# Altium PCB CMSIS-DAP-Pro.PcbDoc
Units mm, origin at the board's own origin, x right, y up, seen from the top; angles counter-clockwise.
Board outline 42.04 x 23.11 mm, 2 copper layers (Top Layer, Bottom Layer); 31 components, 27 nets, 131 pads, 42 vias.
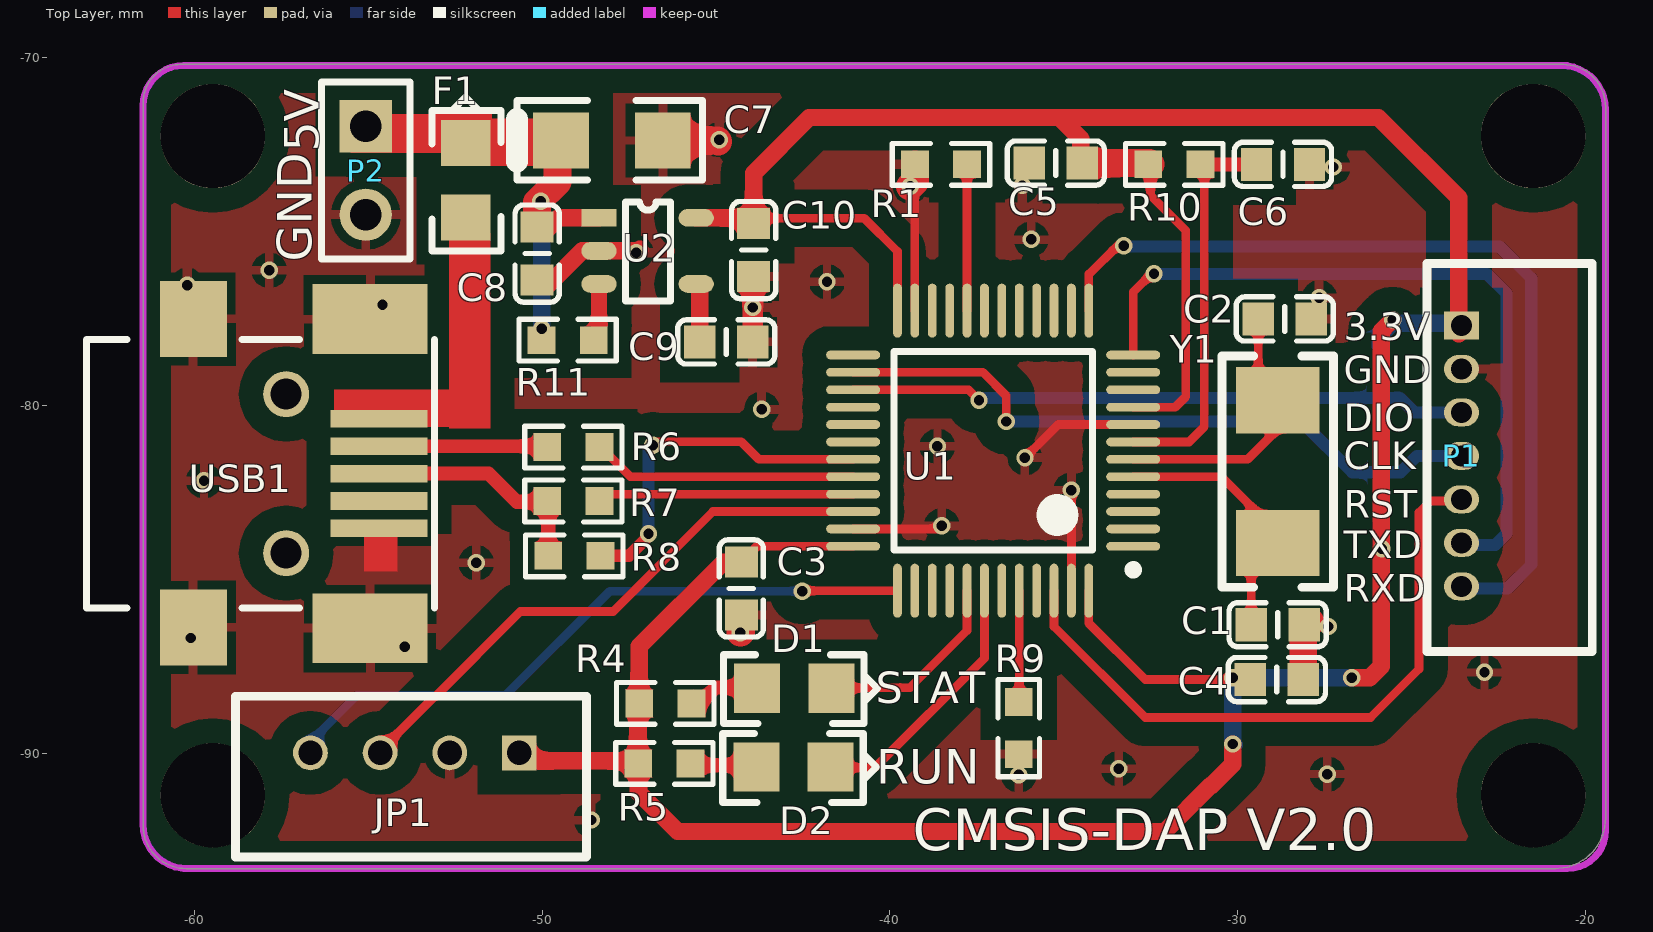
[diagram p0: Top Layer view]
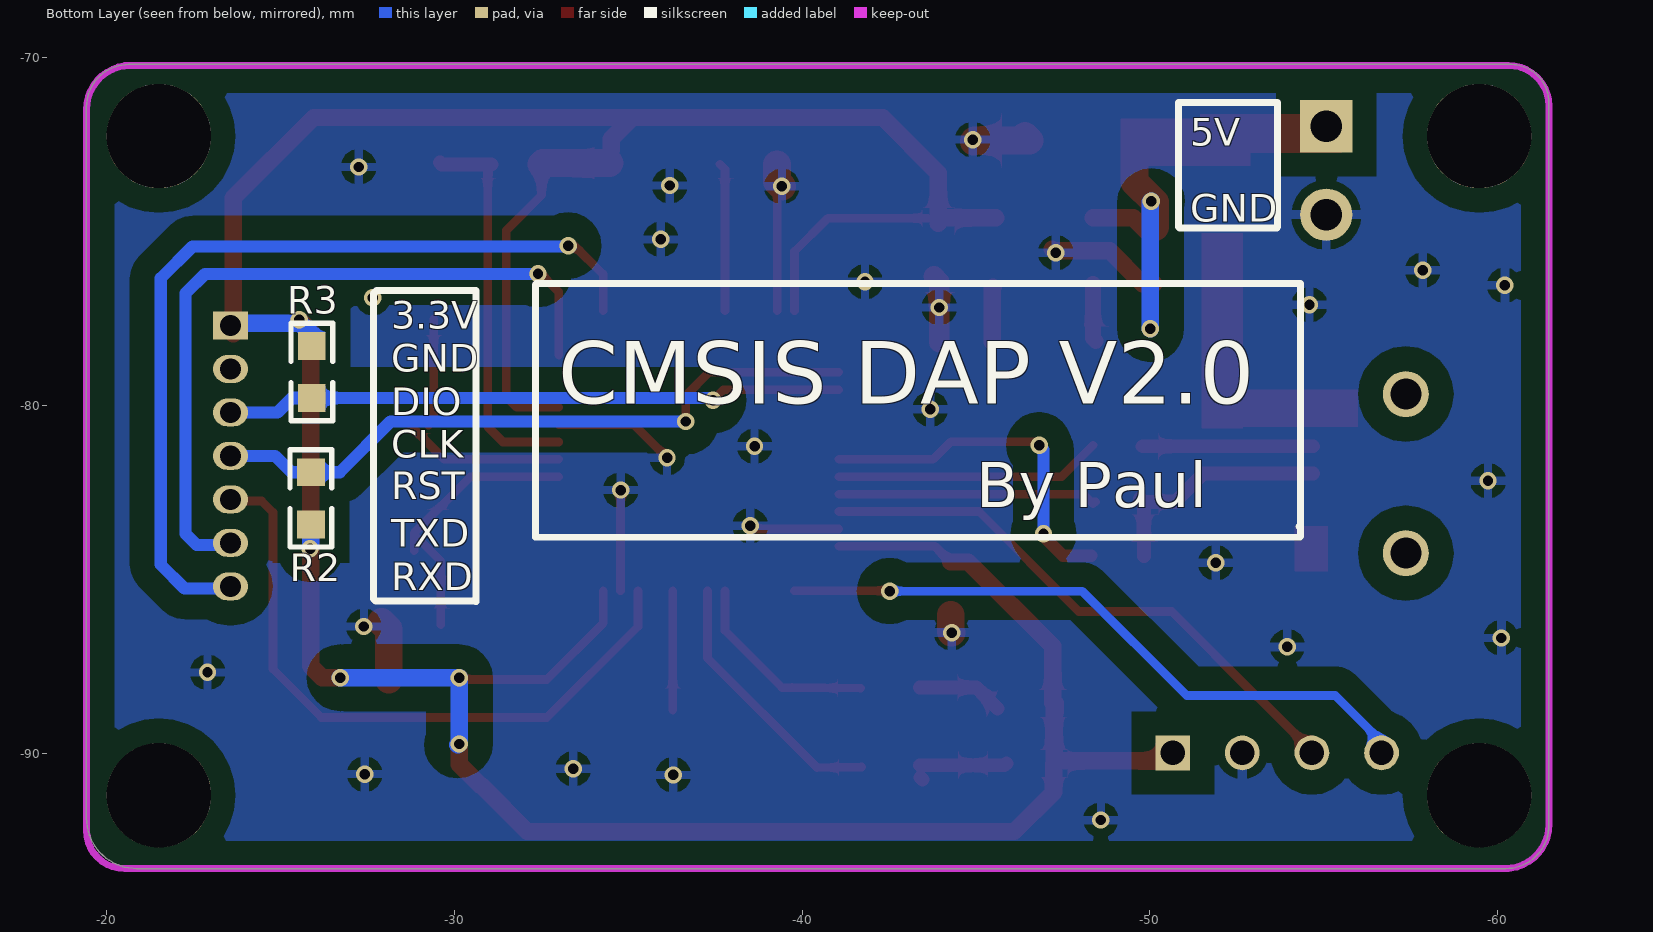
[diagram p1: Bottom Layer view, seen from below]

## Layer stack, top to bottom
Top Solder: solder mask 0.0102, Solder Resist, Dk 3.5
Top Layer: signal copper 0.0356
Dielectric 1: dielectric 0.32, FR-4, Dk 4.8
Bottom Layer: signal copper 0.0356
Bottom Solder: solder mask 0.0102, Solder Resist, Dk 3.5

## Board outline
-61.468,-83.845 -61.468,-78.334 -61.468,-71.298 cw(c-60.376,-71.298) -60.376,-70.206 -20.65,-70.206 cw(c-20.65,-71.425) -19.431,-71.425 -19.431,-91.872 cw(c-20.879,-91.872) -20.879,-93.32 -60.223,-93.32 cw(c-60.223,-92.075) -61.468,-92.075 -61.468,-71.679

## Design rules (kind name [scope] priority, off if disabled: settings)
Clearance [All] p1: gap=0.7
PolygonConnect [All] p1: connectstyle=Relief reliefconductorwidth=0.254 reliefentries=4 polygonreliefangle="90 Angle" airgapwidth=0.254
RoutingVias [All] p1: holewidth=0.3 width=0.5 viastyle="Through Hole" minholewidth=0.3 minwidth=0.5 maxholewidth=0.5 maxwidth=0.8
SolderMaskExpansion [All] p1: expansion=0.102
Width [All] p1: maxlimit=3 minlimit=0.25 preferedwidth=0.45
30 further rules are at their usual default settings.

## Components (designator, comment, footprint, x,y, rotation, side; value= is the part's Value field where it differs from the comment)
C1 "22pF" 0603C -28.854,-86.309 r180 top
C2 "22pF" 0603C -28.651,-77.521 r180 top
C3 "0.1uF" 0603C -44.272,-85.268 r90 top
C4 "0.1uF" 0603C -28.88,-87.884 r180 top
C5 "0.1uF" 0603C -35.23,-73.04 r0 top
C6 "0.1uF" 0603C -28.702,-73.076 r180 top
C7 "10uF/16V" CAP-A -49.454,-72.39 r90 top
C8 "1uF" 0603C -50.14,-75.641 r270 top
C9 "0.01uF" 0603C -44.704,-78.181 r0 top
C10 "22uF" 0603C -43.917,-75.54 r270 top
D1 "RED" LED-0805 -43.815,-88.138 r0 top
D2 "RED" LED-0805 -43.84,-90.399 r0 top
F1 "500mA" 0805 -52.197,-74.6 r90 top
JP1 "SWD" PH2-4P -50.654,-89.992 r180 top
P1 "Header 7" PH-7P-1.25mm -23.571,-77.708 r270 top
P2 "5V" HDR1X2 -55.067,-71.984 r270 top
R1 "10K" 0603R -38.532,-73.076 r180 top
R2 "500R" 0603R -25.883,-82.677 r270 bottom
R3 "500R" 0603R -25.908,-79.045 r90 bottom
R4 "1K" 0603R -46.457,-88.57 r180 top
R5 "1K" 0603R -46.482,-90.297 r180 top
R6 "22R" 0603R -49.098,-81.204 r180 top
R7 "22R" 0603R -49.098,-82.753 r180 top
R8 "Res1" 0603R -49.073,-84.328 r0 top
R9 "10K" 0603R -36.297,-89.281 r270 top
R10 "10K" 0603R -31.826,-73.076 r180 top
R11 "4.7K" 0603R -49.264,-78.13 r0 top
U1 "STM32F103C8T6" LQFP48_L -37.033,-81.305 r180 top locked
U2 "CAT6219-330TD-GT3" SOT-23-5 -48.362,-74.615 r0 top
USB1 "USB" USB_MINIB_SMT -54.686,-80.391 r0 top locked
Y1 "8MHZ" SMD-5032_2P -28.854,-81.908 r90 top

## Footprints (in the part's own frame and the unit in brackets; to place one, negate y for a bottom-side part, rotate by r counter-clockwise, add the part's x,y. Pads: shape width x height; smd on the part's side, far side on the other; paste and mask are expansions set on the pad)
0603C [mm]
  rect 0.9x0.95 smd: 1(-0.762,0) 2(0.762,0)
  silkscreen extent -1.4,-0.64 1.4,0.64
0603R [mm]
  rect 0.8x0.8 smd: 1(-0.75,0) 2(0.75,0)
  silkscreen extent -1.4,-0.6 1.4,0.6
0805 [mil]
  rect 52x56 smd: 1(0,0) 2(84,0)
  silkscreen extent -38,-40 136,38
CAP-A [mm]
  rect 1.6x1.6 smd: 1(0,0) 2(0,-2.921)
  silkscreen extent -1.14,-4.06 1.14,1.27
HDR1X2 [mm] "Connector; Header; 2 Position"
  rect 1.5x1.5 hole 0.9: 1(0,0)
  round 1.5 hole 0.9: 2(2.54,0)
  silkscreen extent -1.27,-1.27 3.81,1.27
LED-0805 [mil]
  rect 52x56 smd: 1(0,0) 2(84,0)
  silkscreen extent -38,-40 136,38
LQFP48_L [mm]
  oval 1.55x0.25 smd: 1(-4.025,2.75) 2(-4.025,2.25) 3(-4.025,1.75) 4(-4.025,1.25) 5(-4.025,0.75) 6(-4.025,0.25) 7(-4.025,-0.25) 8(-4.025,-0.75) 9(-4.025,-1.25) 10(-4.025,-1.75) 11(-4.025,-2.25) 12(-4.025,-2.75) 25(4.025,-2.75) 26(4.025,-2.25) 27(4.025,-1.75) 28(4.025,-1.25) 29(4.025,-0.75) 30(4.025,-0.25) 31(4.025,0.25) 32(4.025,0.75) 33(4.025,1.25) 34(4.025,1.75) 35(4.025,2.25) 36(4.025,2.75)
  oval 0.25x1.55 smd: 13(-2.75,-4.025) 14(-2.25,-4.025) 15(-1.75,-4.025) 16(-1.25,-4.025) 17(-0.75,-4.025) 18(-0.25,-4.025) 19(0.25,-4.025) 20(0.75,-4.025) 21(1.25,-4.025) 22(1.75,-4.025) 23(2.25,-4.025) 24(2.75,-4.025) 37(2.75,4.025) 38(2.25,4.025) 39(1.75,4.025) 40(1.25,4.025) 41(0.75,4.025) 42(0.25,4.025) 43(-0.25,4.025) 44(-0.75,4.025) 45(-1.25,4.025) 46(-1.75,4.025) 47(-2.25,4.025) 48(-2.75,4.025)
  silkscreen extent -4.15,-2.85 2.85,3.55
PH2-4P [mm] "2mm"
  rect 1x1 hole 0.7: 1(0,0)
  round 1 hole 0.7: 2(2,0) 3(4,0) 4(6,0)
  silkscreen extent -1.93,-1.63 8.15,3
PH-7P-1.25mm [mm] "1.25mm"
  rect 0.8x1 hole 0.6: 1(0,0)
  oval 0.8x1 hole 0.6: 2(1.25,0) 3(2.5,0) 4(3.75,0) 5(5,0) 6(6.25,0) 7(7.5,0)
  silkscreen extent -1.78,-0.99 9.37,3.76
SMD-5032_2P [mm]
  rect 1.9x2.4 smd: 1(-2.05,0) 2(2.05,0)
  silkscreen extent -3.32,-1.6 3.32,1.6
SOT-23-5 [mil]
  rect 40x20 smd: 1(0,0)
  oval 40x20 smd: 2(0,-37.4) 3(0,-74.8) 4(110,-74.8) 5(110,0)
  silkscreen extent 30,-94 81,18
USB_MINIB_SMT [mil]
  round 52 hole 35: 0(-105,-152) 0(-105,28)
  rect 110x20 smd: 1(0,0) 2(0,-31) 3(0,-62) 4(0,-93) 5(0,-124)
  rect 130x79 smd: 6(-10,113) 7(-10,-237)
  rect 76x86 smd: 8(-210,113) 9(-210,-236)
  silkscreen extent -331,-214 63,90

## Part data
C1 C2 C3 C4 C5: library part Cap, "Capacitor"
C6 C8 C9 C10: library part CAP, "Capacitor"
C7: library part "CAPACITOR POL", "Capacitor"
D1 D2: library part LED0, "Typical INFRARED GaAs LED"
F1: library part "Fuse 2", "Fuse"
JP1: library part "Header 4", "Header, 4-Pin"
P1: "Header, 7-Pin"
P2: library part "Header 2", "Header, 2-Pin"
R1 R2 R3 R4 R5 R6 R7 R9 R11: library part Res2, "Resistor"
R8: "贴片电阻"
R10: library part RES2
U1: "STM32 ARM-based 32-bit MCU with 64 Kbytes Flash, 48-pin LQFP, Industrial Temperature"
U2: library part CAT6219, "Connector"
USB1: library part USB5
Y1: library part CRYSTAL, "Crystal"

## Free pads (board coordinates)
  round 3 hole 3: 2(-59.461,-72.263) 3(-59.461,-91.211) 4(-21.514,-91.211) 5(-21.514,-72.263)

## Via types
v1: diameter 0.5, hole 0.3, Top Layer to Bottom Layer, tented both sides, 42 vias

## Nets (pads, with @x,y where several pads share a name; then routed paths per layer and width w, separated by ;. In a path a pad name is that pad's centre, name@x,y a point inside that pad or via, vN(x,y) a via of type N, cw(c..) or ccw(c..) an arc to the next point about the centre after c; other vN are vias at no path point)
3.3V: C3.2 C4.2 C5.2 C10.1 JP1.1 P1.1 R2.2 R3.2 R4.2 R5.2 R10.2 U1.9 U1.24 U1.36 U1.48 U2.5 | length 106.8
  Top Layer w0.25: C3.2 -43.822,-84.055 U1.36 ; C10.1@-43.612,-74.625 -40.742,-74.625 -39.783,-75.584 U1.24 ; U1.48 -34.283,-86.265 -32.664,-87.884 v1@-30.175,-87.884 ; U1.9 -31.795,-80.055 -31.496,-79.756 -31.496,-74.981 -32.512,-73.965 R10.2@-32.512,-73.076 ; v1@-30.175,-87.782 -30.074,-87.884 C4.2 C4.2@-29.616,-87.884
  Top Layer w0.5: JP1.1@-50.724,-89.891 -50.394,-90.221 -47.245,-90.221 R4.2@-47.245,-88.774 ; R4.2@-47.283,-88.824 R4.2@-47.283,-88.57 ; R5.2 -47.232,-91.122 -46.101,-92.253 -32.106,-92.253 -30.772,-90.919 ; R4.2 -47.207,-86.932 -44.78,-84.506 C3.2 ; U2.5 C10.1@-43.917,-74.615 ; C10.1 C10.1@-43.917,-74.615 ; C5.2@-34.519,-72.669 -34.519,-72.339 -35.128,-71.73 ; -30.759,-90.932 -30.15,-90.322 v1(-30.15,-89.738) ; v1(-26.721,-87.833) -26.213,-87.833 -25.883,-87.503 -25.883,-77.876 v1@-25.629,-77.622 ; P1.1@-23.647,-77.953 -23.647,-74.041 -25.959,-71.73 -35.128,-71.73 ; C10.1@-43.917,-74.615 -43.917,-73.33 -42.316,-71.73 -35.128,-71.73
  Top Layer w0.8: C5.2 -32.548,-73.04 R10.2@-32.512,-73.076
  Bottom Layer w0.5: v1@-30.099,-89.764 -30.15,-89.713 v1(-30.15,-87.833) v1@-26.822,-87.833 ; v1@-26.746,-87.833 v1(-26.721,-87.833) ; R3.2 -25.908,-77.978 -25.578,-77.648 P1.1@-23.444,-77.648 ; v1@-25.883,-83.972 R2.2
  other v1: -25.857,-84.125 -25.552,-77.546
DAP_NRST: P1.5 U1.46 | length 19
  Top Layer w0.25: U1.46 -35.283,-86.357 -32.664,-88.976 -26.187,-88.976 -24.79,-87.579 -24.79,-83.083 -24.46,-82.753 P1.5@-23.647,-82.753
DAP_RX: P1.7 U1.13 | length 25.3
  Top Layer w0.25: U1.13 -34.283,-76.244 ; -34.283,-76.219 -34.283,-76.244 ; v1@-33.325,-75.413 v1(-33.274,-75.413) v1@-33.274,-75.336 ; v1@-33.325,-75.387 -33.426,-75.387 -34.283,-76.244
  Bottom Layer w0.35: v1@-33.35,-75.438 -22.479,-75.438 -21.565,-76.352 -21.565,-84.582 -22.25,-85.268 P1.7@-23.673,-85.268
DAP_SWCLK: P1.4 R2.1 U1.26 | length 19.3
  Top Layer w0.25: U1.26 -37.327,-79.055 -36.652,-79.731 v1(-36.652,-80.467)
  Bottom Layer w0.35: v1(-36.652,-80.467) -28.169,-80.467 -26.709,-81.927 R2.1 -25.324,-81.927 -24.855,-81.458 P1.4
DAP_SWDIO: P1.3 R3.1 U1.27 | length 17.8
  Top Layer w0.25: U1.27 -37.742,-79.555 v1(-37.44,-79.858)
  Bottom Layer w0.35: v1(-37.44,-79.858) -37.377,-79.795 R3.1 -25.336,-79.795 -24.923,-80.208 P1.3
DAP_TX: P1.6 U1.12 | length 21.5
  Top Layer w0.25: U1.12 -33.008,-76.747 v1@-32.385,-76.124
  Bottom Layer w0.35: v1@-32.41,-76.2 v1(-32.41,-76.225) -22.835,-76.225 -22.276,-76.784 -22.276,-83.693 -22.601,-84.018 P1.6@-23.673,-84.018
DC5V: C7.1 C8.1 F1.2 P2.1 R11.1 U2.1 | length 8.1
  Top Layer w0.5: C8.1@-49.911,-75.006 -49.52,-74.615 U2.1
  Top Layer w0.8: C8.1 -50.14,-74.168 -49.555,-73.584 C7.1@-49.555,-72.441
  Bottom Layer w0.5: v1(-50.038,-74.143) -50.013,-74.168 v1(-50.013,-77.8)
GND: C1.1 C2.1 C3.1 C4.1 C5.1 C6.1 C7.2 C8.2 C9.2 C10.2 JP1.2 P1.2 P2.2 R1.2 R9.2 U1.8 U1.23 U1.35 U1.47 U2.2 USB1.5 USB1.6 USB1.7 USB1.8 USB1.9 | length 22.5
  Top Layer w0.25: U1.35 -38.597,-83.555 v1@-38.583,-83.541 ; v1(-39.421,-73.711) -39.283,-73.848 U1.23 ; v1(-36.119,-81.509) -35.166,-80.555 U1.8 ; U1.47 v1(-34.783,-82.438)
  Top Layer w0.5: C8.2@-50.114,-76.505 -49.784,-76.505 -48.844,-75.565 U2.2 -47.244,-75.565 v1@-47.193,-75.514
  Top Layer w0.6: C9.2 v1(-43.942,-77.191) -43.942,-76.454 C10.2@-43.79,-76.302
  Top Layer w0.8: C7.2@-46.406,-72.263 C7.2 -44.958,-72.39 v1@-44.933,-72.415 ; v1(-44.298,-86.538) -44.272,-86.512 C3.1 ; v1(-39.421,-73.711) -39.282,-73.572 R1.2 ; C4.1 -28.118,-86.436 C1.1@-27.915,-86.233
  other v1: -48.59,-91.923 -36.297,-90.627 -27.432,-90.602 -33.426,-90.449 -22.911,-87.681 -53.95,-86.944 -60.096,-86.69 -27.407,-86.36 -51.892,-84.531 -38.506,-83.464 -59.715,-82.169 -38.633,-81.178 -43.688,-80.112 -54.585,-77.114 -27.661,-76.911 -60.198,-76.556 -41.808,-76.454 -57.836,-76.124 -47.295,-75.616 -35.941,-75.235 -36.195,-73.685 -27.254,-73.152 -44.907,-72.365
LED1: D1.2 U1.41 | length 7.7
  Top Layer w0.25: -39.7,-88.113 D1.2 -39.421,-88.113 -37.783,-86.475 U1.41
LED2: D2.2 U1.42 | length 7.7
  Top Layer w0.25: D2.2 -40.437,-90.424 -37.283,-87.27 U1.42
NetC1_2: C1.2 U1.5 Y1.1 | length 8.1
  Top Layer w0.25: U1.5 -30.467,-82.055 -28.854,-83.668 Y1.1 Y1.1@-28.854,-84.176 ; C1.2 -29.616,-84.48 Y1.1@-28.981,-83.845
NetC2_2: C2.2 U1.6 Y1.2 | length 7.7
  Top Layer w0.25: U1.6 -29.714,-81.555 Y1.2@-28.778,-80.62 ; C2.2 -29.413,-80.416 Y1.2@-29.261,-80.569
NetC9_1: C9.1 U2.4 | length 1.6
  Top Layer w0.5: U2.4@-45.491,-76.606 -45.466,-76.632 C9.1
NetD1_1: D1.1 R4.1 | length 2.5
  Top Layer w0.4: R4.1@-45.618,-88.722 -45.009,-88.113 D1.1@-43.383,-88.113
NetD2_1: D2.1 R5.1 | length 2.6
  Top Layer w0.4: R5.1@-45.872,-90.297 -45.822,-90.348 D2.1@-43.383,-90.348 ; D2.1@-43.459,-90.754 D2.1@-43.409,-90.703
NetF1_1: F1.1 USB1.1
NetR1_1: R1.1 U1.20 | length 4.3
  Top Layer w0.25: U1.20 -37.783,-73.216 R1.1@-37.643,-73.076
NetR6_2: R6.2 USB1.2 | length 4.9
  Top Layer w0.4: USB1.2 R6.2@-49.784,-81.178
NetR7_2: R7.2 R8.1 USB1.3 | length 6.9
  Top Layer w0.4: USB1.3 -51.537,-81.966 -50.724,-82.779 R7.2@-49.809,-82.779 ; R8.1 -49.823,-82.792 R7.2@-49.809,-82.779 ; R7.2@-49.708,-82.677 R7.2@-49.809,-82.779
NetR9_1: R9.1 U1.44 | length 3.4
  Top Layer w0.25: R9.1@-36.283,-88.76 U1.44
NetR11_2: R11.2 U2.3 | length 1.7
  Top Layer w0.45: R11.2@-48.438,-78.156 -48.362,-78.08 U2.3
NRST: C6.2 R10.1 U1.7 | length 11.3
  Top Layer w0.25: U1.7 -31.398,-81.055 -31.394,-81.051 -30.963,-80.62 -30.963,-73.076 -30.963,-73.05 R10.1@-30.988,-73.025
  Top Layer w0.4: R10.1 -30.963,-73.076 -29.642,-73.076 C6.2@-29.591,-73.025
SWCLK: JP1.4 U1.37 | length 19
  Top Layer w0.25: v1(-42.52,-85.344) -42.506,-85.33 U1.37
  Bottom Layer w0.25: JP1.4 -56.654,-89.674 -55.321,-88.341 -51.054,-88.341 -48.057,-85.344 v1(-42.52,-85.344)
SWDIO: JP1.3 U1.34 | length 16.4
  Top Layer w0.25: JP1.3@-54.61,-89.891 -53.111,-88.392 -53.086,-88.392 -50.622,-85.928 -47.955,-85.928 -45.082,-83.055 U1.34
USBCON: R8.2 U1.31 | length 10.3
  Top Layer w0.25: v1@-46.838,-81.128 -46.761,-81.051 -44.272,-81.051 -43.768,-81.555 U1.31
  Top Layer w0.35: R8.2 -47.498,-84.328 v1@-46.888,-83.718
  Bottom Layer w0.35: v1(-46.939,-83.693) -46.939,-81.28 v1(-46.812,-81.153)
USBDM: R6.1 U1.32 | length 7.7
  Top Layer w0.25: R6.1@-48.362,-81.153 -47.459,-82.055 U1.32
USBDP: R7.1 U1.33 | length 7.5
  Top Layer w0.25: R7.1@-48.438,-82.779 R7.1@-48.362,-82.779 ; R7.1@-48.362,-82.829 -48.088,-82.555 U1.33
pads on no net: U1.1 U1.2 U1.3 U1.4 U1.10 U1.11 U1.14 U1.15 U1.16 U1.17 U1.18 U1.19 U1.21 U1.22 U1.25 U1.28 U1.29 U1.30 U1.38 U1.39 U1.40 U1.43 U1.45 USB1.0 USB1.4

## Polygon pours and split planes (outlines as drawn)
GND on Top Layer "Top Layer-No Net" (solid, remove dead copper, pour order 0): -61.501,-78.188 -61.501,-88.297 -61.501,-91.958 ccw(c-59.854,-91.958) -61.019,-93.123 ccw(c-60.283,-92.387) -60.283,-93.428 -59.444,-93.428 -20.409,-93.428 ccw(c-20.409,-92.127) -19.49,-93.047 ccw(c-20.225,-92.311) -19.185,-92.311 -19.185,-91.751 -19.185,-71.6 ccw(c-20.572,-71.6) -19.591,-70.619 ccw(c-20.327,-71.354) -20.327,-70.314 -20.506,-70.314 -60.139,-70.314 ccw(c-60.139,-71.701) -61.12,-70.72 ccw(c-60.262,-71.579) -61.476,-71.579 -61.476,-71.66 -61.476,-78.152 cw(c-61.563,-78.152) -61.501,-78.213
GND on Bottom Layer "Top Layer-No Net" (solid, pour order 2): -61.514,-78.048 -61.514,-88.157 -61.514,-91.818 ccw(c-59.866,-91.818) -61.031,-92.983 ccw(c-60.295,-92.247) -60.295,-93.288 -59.457,-93.288 -20.422,-93.288 ccw(c-20.422,-91.987) -19.502,-92.907 ccw(c-20.238,-92.171) -19.198,-92.171 -19.198,-91.611 -19.198,-71.46 ccw(c-20.585,-71.46) -19.604,-70.479 ccw(c-20.34,-71.214) -20.34,-70.174 -20.518,-70.174 -60.152,-70.174 ccw(c-60.152,-71.561) -61.133,-70.58 ccw(c-60.274,-71.439) -61.489,-71.439 -61.489,-71.52 -61.489,-78.012 cw(c-61.575,-78.012) -61.514,-78.073

## Keep-outs
Keep-Out Layer:
  lines w0.2: -60.3,-93.32 -20.523,-93.32 ; -60.071,-70.231 -20.523,-70.231 ; -20.523,-93.32 ccw(c-20.523,-92.227) -19.431,-92.227 -19.431,-71.501 ccw(c-20.701,-71.501) -20.701,-70.231 -60.3,-70.231 ccw(c-60.3,-71.399) -61.468,-71.399 -61.468,-92.05 ccw(c-60.198,-92.05) -60.198,-93.32 -20.523,-93.32

## Other copper
Top Layer:
  rectangle net NetF1_1: -55.982,-80.62 -51.486,-79.553
  rectangle net NetF1_1: -52.68,-80.67 -51.486,-75.057
  rectangle net DC5V: -52.883,-73.127 -49.149,-71.755
  rectangle net DC5V: -55.499,-72.746 -51.435,-71.628
  rectangle net GND: -55.118,-84.785 -54.153,-83.464

## Silkscreen, mask and mechanical layers (free items; w line width, h text height)
Top Overlay:
  text "5V" at -56.413,-72.72 h1 r90
  text "GND" at -56.617,-75.87 h1 r90
  text "3.3V" at -26.949,-78.13 h0.8
  text "GND" at -26.949,-79.375 h0.8
  text "DIO" at -26.949,-80.747 h0.8
  text "CLK" at -26.949,-81.839 h0.8
  text "RST" at -26.949,-83.236 h0.8
  text "TXD" at -26.949,-84.404 h0.8
  text "RXD" at -26.949,-85.649 h0.8
  text "STAT" at -40.411,-88.57 h0.9
  text "RUN" at -40.386,-90.881 h1
  text "CMSIS-DAP V2.0" at -39.345,-92.786 h1.2
Bottom Overlay:
  lines w0.2: -54.331,-83.769 -54.331,-77.089 -54.331,-76.505 -32.36,-76.505 ; -54.305,-83.795 -32.334,-83.795 -32.334,-76.53 ; -54.305,-83.464 -54.28,-83.49 ; -53.67,-74.879 -53.645,-74.905 -50.851,-74.905 -50.825,-74.879 -50.825,-71.298 -53.67,-71.298 -53.67,-74.879 ; -30.632,-85.649 -30.607,-85.623 -27.737,-85.623 -27.686,-85.573 -27.686,-76.784 -27.762,-76.708 -30.632,-76.708 -30.632,-85.649
  text "5V" at -51.156,-72.542 h0.8
  text "GND" at -51.156,-74.727 h0.8
  text "3.3V" at -28.194,-77.8 h0.8
  text "GND" at -28.194,-79.045 h0.8
  text "CMSIS DAP V2.0" at -32.995,-79.959 h1.8
  text "DIO" at -28.194,-80.289 h0.8
  text "CLK" at -28.194,-81.509 h0.8
  text "RST" at -28.194,-82.702 h0.8
  text "By Paul" at -45.009,-82.931 h1.3
  text "TXD" at -28.194,-84.074 h0.8
  text "RXD" at -28.194,-85.319 h0.8
Mechanical 1:
  lines w0.2: -61.468,-79.197 -61.468,-71.476 cw(c-60.198,-71.476) -60.198,-70.206 -20.701,-70.206 ; -61.468,-71.399 -61.468,-92.05 ccw(c-60.198,-92.05) -60.198,-93.32 -20.701,-93.32 ; -60.274,-70.231 -55.982,-70.231 ; -60.223,-70.231 -54.61,-70.231 ; -60.223,-70.206 -53.594,-70.206 ; -59.995,-70.206 -20.549,-70.206 ; -25.527,-70.206 -20.701,-70.206 ; -21.92,-70.206 -20.701,-70.206 ; -21.107,-93.32 -20.701,-93.32 ; -19.431,-88.976 -19.431,-92.05 ; -19.431,-78.74 -19.431,-71.476 ; -19.431,-72.771 -19.431,-71.476 ; -20.701,-93.32 ccw(c-20.701,-92.05) -19.431,-92.05 ; -20.701,-70.206 cw(c-20.701,-71.476) -19.431,-71.476 ; -20.701,-70.206 cw(c-20.701,-71.476) -19.431,-71.476 ; -20.701,-70.206 cw(c-20.701,-71.476) -19.431,-71.476 ; -19.431,-92.05 -19.431,-71.476
  lines w0.254: -61.745,-68.843 -61.745,-68.335 ; -60.222,-68.08 -61.745,-68.589 ; -60.22,-69.096 -61.745,-68.589 ; -48.535,-68.573 -61.745,-68.589 ; -32.995,-68.555 -19.784,-68.539 ; -21.309,-68.032 -19.784,-68.539 ; -21.308,-69.048 -19.784,-68.539 ; -19.784,-68.793 -19.785,-68.285 ; -17.887,-71.891 -17.382,-70.366 ; -17.843,-91.932 -17.331,-93.455 ; -17.636,-70.367 -17.128,-70.366 ; -17.585,-93.455 -17.077,-93.454 ; -17.374,-73.887 -17.382,-70.366 ; -17.339,-89.934 -17.331,-93.455 ; -16.871,-71.889 -17.382,-70.366 ; -16.827,-91.93 -17.331,-93.455
  text "41.961 (mm)" at -48.28,-69.487 h1.52 r0.07
  text "23.089 (mm)" at -18.288,-74.143 h1.52 r270.13